# Altium PCB Meas_Board.PcbDoc
Units mm, origin at the board's own origin, x right, y up, seen from the top; angles counter-clockwise.
Board outline 25.4 x 55.12 mm, 2 copper layers (Top Layer, Bottom Layer); 28 components, 21 nets, 103 pads, 35 vias.
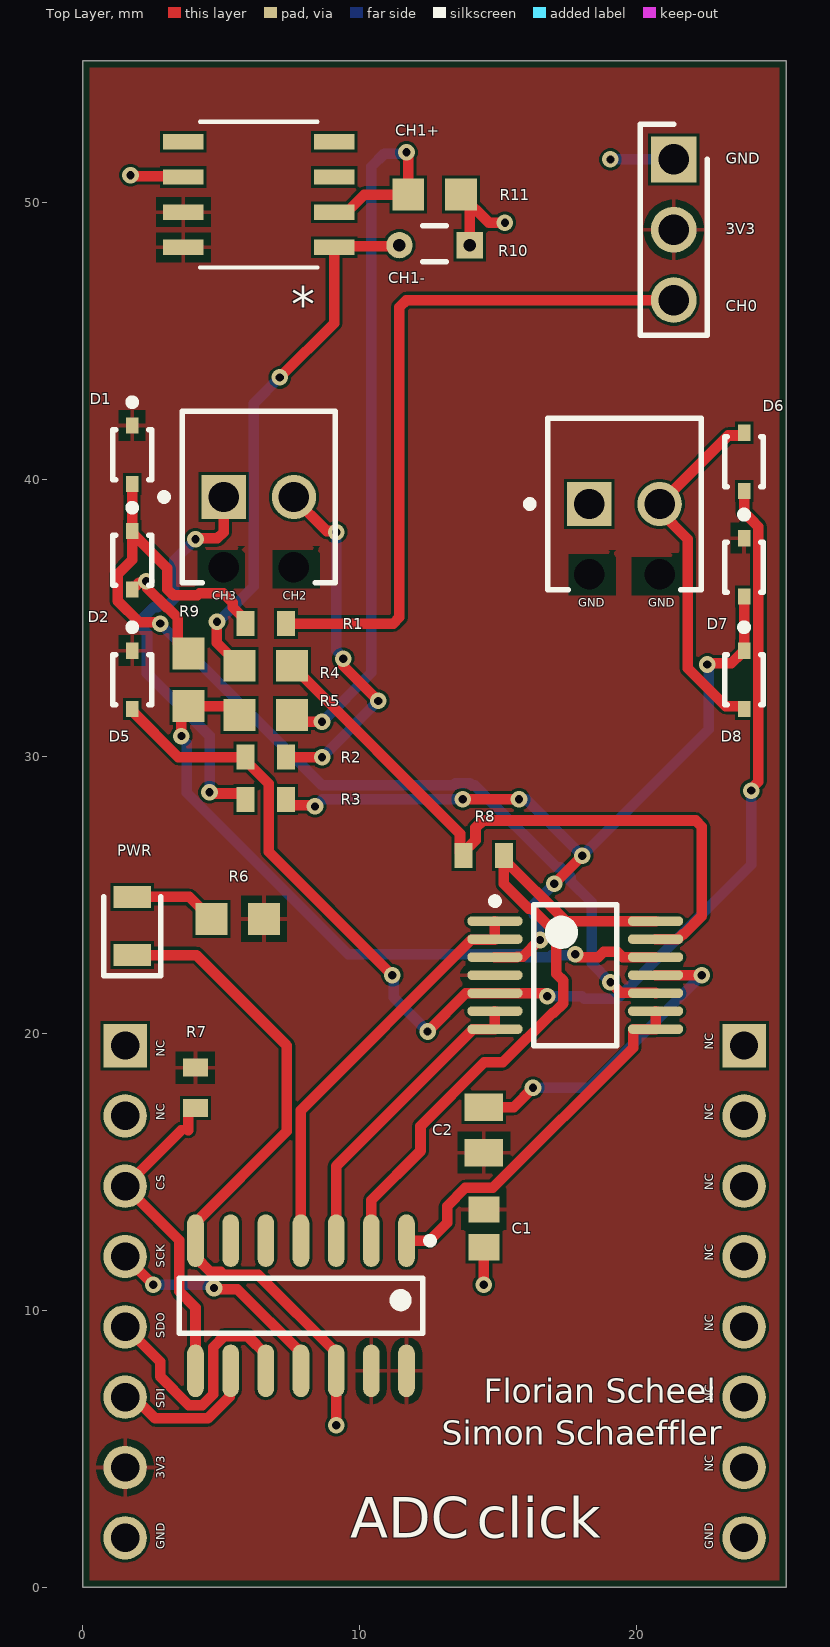
[diagram p0: Top Layer view]
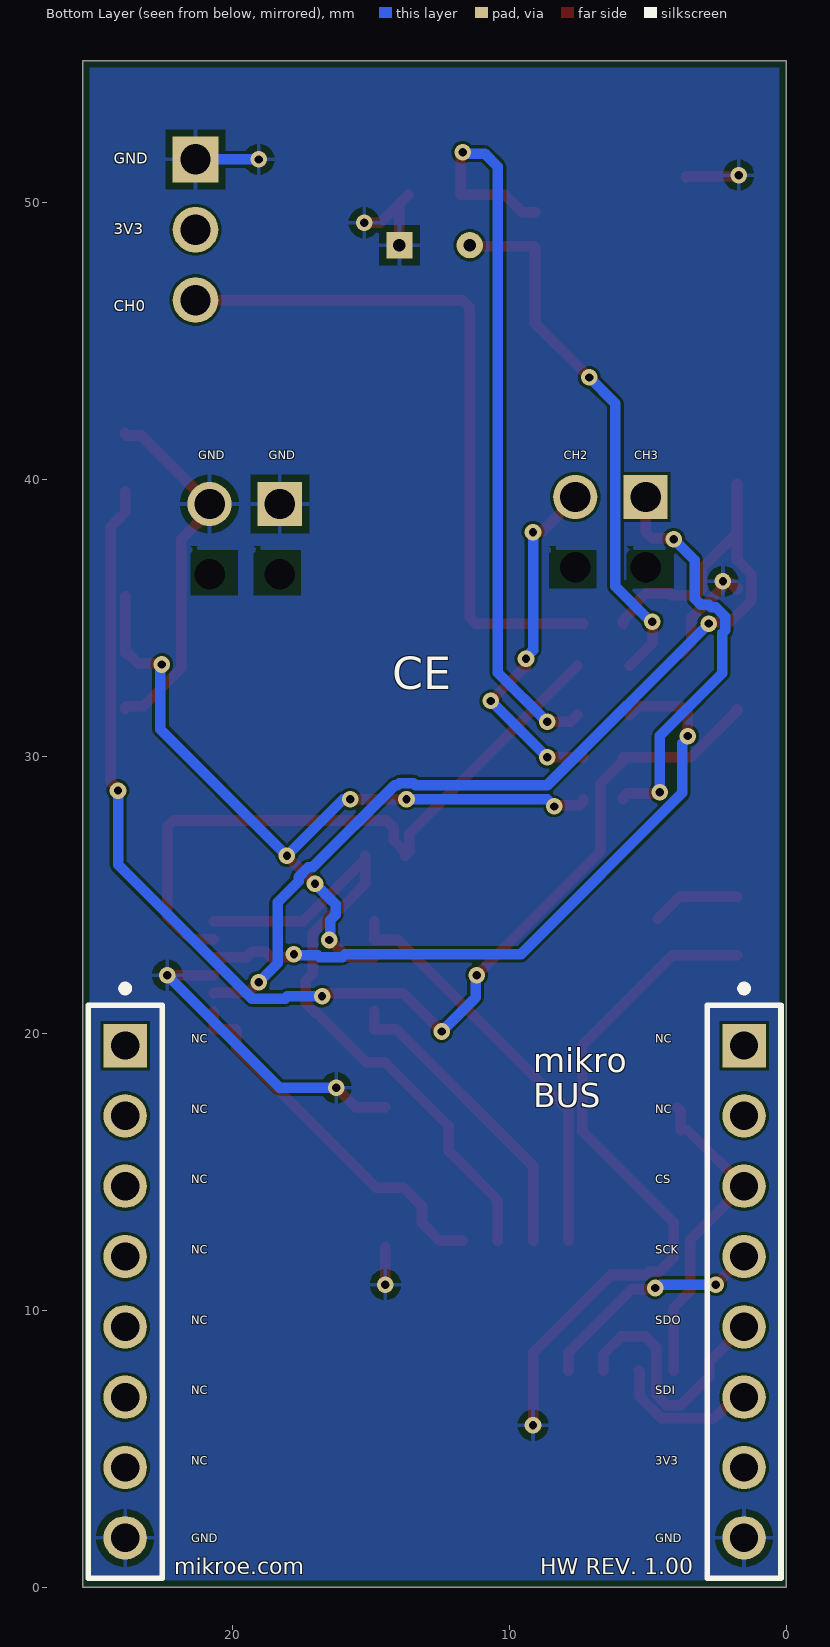
[diagram p1: Bottom Layer view, seen from below]
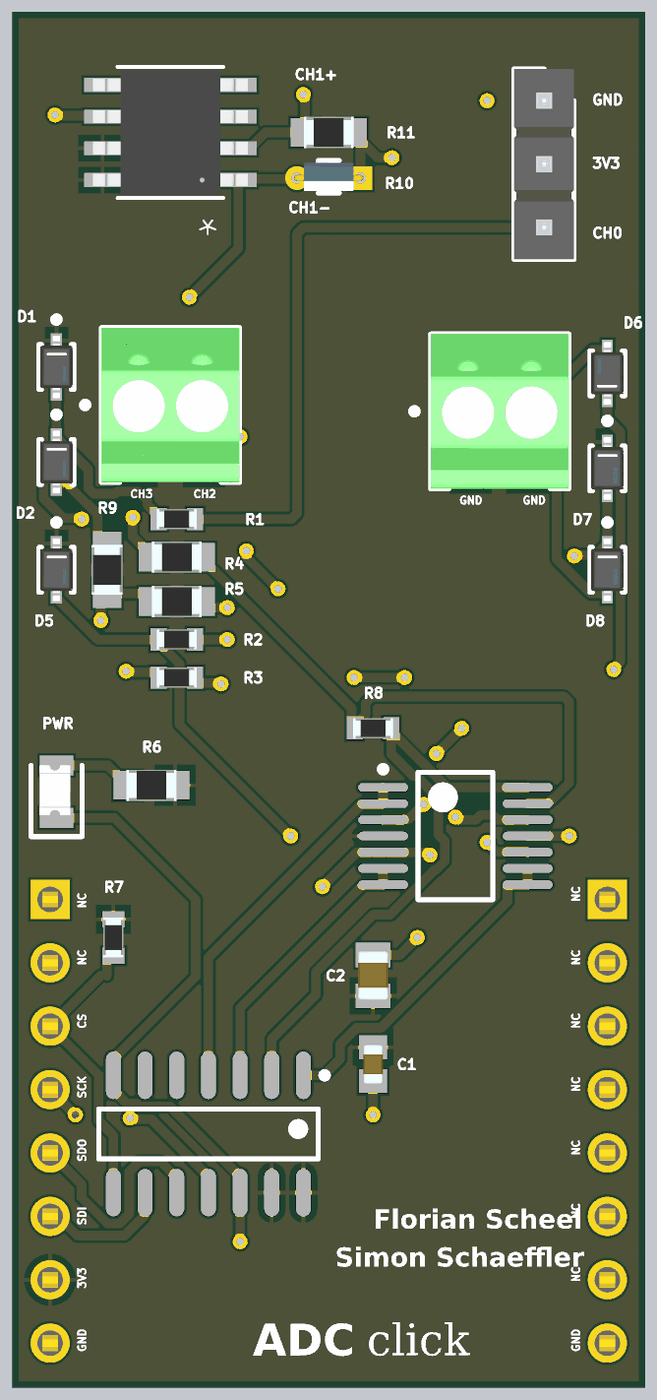
[diagram p2: 3D render of the assembled board from above, using the file's embedded part models]

## Layer stack, top to bottom
Top Solder: solder mask 0.0102, Solder Resist, Dk 3.5
Top Layer: signal copper 0.0356
Dielectric 1: dielectric 0.32, FR-4, Dk 4.8
Bottom Layer: signal copper 0.0356
Bottom Solder: solder mask 0.0102, Solder Resist, Dk 3.5

## Board outline
0,0 25.4,0 25.4,55.118 0,55.118

## Design rules (kind name [scope] priority, off if disabled: settings)
Clearance [All] p1: gap=0.1 ignorepadtopadclearanceinfootprint=FALSE except(0: Arc-Hole Track-Hole SMDPad-Hole THPad-Hole Via-Hole Fill-Hole Poly-Hole Region-Hole Text-Hole)
DiffPairsRouting [All] p1: maxlimit=10 minlimit=0.125 mostfreqgap=0.15 toplayer_minwidth=0.381 toplayer_maxwidth=0.381 toplayer_prefwidth=0.381 bottomlayer_minwidth=0.381 bottomlayer_maxwidth=0.381 bottomlayer_prefwidth=0.381 maxuncoupledlength=12.7
FabricationTestPointUsage FabricationTestPointUsage_1 [All] p1: valid=0 allowmultiple=FALSE
FabricationTestpoint FabricationTestpoint_1 [All] p1: side=3 testpointundercomponent=TRUE minsize=1.016 maxsize=2.54 preferedsize=1.524 minholesize=0 maxholesize=1.016 preferedholesize=0.813 testpointgrid=0.025 allowsidetop=TRUE allowsidebottom=TRUE usegrid=TRUE gridtolerance=0
HoleSize [All] p1: absolutevalues=TRUE maxlimit=6 minlimit=0.1 maxpercent=80.000 minpercent=20.000
HoleSize FabricationTestpoint [All] p2 off: absolutevalues=TRUE maxlimit=2.54 minlimit=0.025 maxpercent=80.000 minpercent=20.000
HoleSize FabricationTestPointUsage [All] p3 off: absolutevalues=TRUE maxlimit=2.54 minlimit=0.025 maxpercent=80.000 minpercent=20.000
MinimumSolderMaskSliver [All] p1: minsoldermaskwidth=0.07
MinimumSolderMaskSliver SilkscreenOverComponentPads [All] p2: minsoldermaskwidth=0.254
PlaneClearance [All] p1: clearance=0.5
PlaneConnect [All] p1: planeconnectstyle=Relief reliefexpansion=0.4 reliefentries=4 reliefconductorwidth=0.15 reliefairgap=0.15
PolygonConnect [All] p1: connectstyle=Relief reliefconductorwidth=0.15 reliefentries=4 polygonreliefangle="90 Angle" airgapwidth=0.254
RoutingCorners [All] p1: cornerstyle=45-Degree minsetback=1.25 maxsetback=1.25
RoutingVias [All] p1: holewidth=0.3 width=0.6 viastyle="Through Hole" minholewidth=0.2 minwidth=0.45 maxholewidth=0.45 maxwidth=0.75
SilkToSolderMaskClearance [IsPad] p1: minsilkscreentomaskgap=0.2 clearancetoexposedcopper=TRUE
SolderMaskExpansion [All] p1: expansion=0.03 istentingtop=FALSE
SupplyNets "Schematic Supply Nets_1" [InNet('3V3')] p1: voltage=0.000
SupplyNets "Schematic Supply Nets" [InNet('GND')] p2: voltage=0.000
Width [All] p1: maxlimit=10 minlimit=0.1 preferedwidth=0.125 minimp=50.000000 maximp=50.000000 favimp=50.000000
21 further rules are at their usual default settings.

## Classes and differential pairs
component class U_ADCclick: C1 C2 D1 D2 D5 D6 D7 D8 PWR R1 R2 R3 R4 R5 R6 R7 R8 R9
component class Meas_Board: R10 R11

## Components (designator, comment, footprint, x,y, rotation, side; value= is the part's Value field where it differs from the comment)
C1 "Cap_Generic" IMP_0603 14.478,12.954 r270 top value=100nF
C2 "Cap_Generic" IMP_0805 14.478,16.51 r90 top value=1µF
D1 "BAT43WS-7-F" FP-SOD323-MFG 1.778,40.894 r270 top value=10pF
D2 "BAT43WS-7-F" FP-SOD323-MFG 1.778,37.084 r270 top value=10pF
D5 "BAT43WS-7-F" FP-SOD323-MFG 1.778,32.766 r270 top value=10pF
D6 "BAT43WS-7-F" FP-SOD323-MFG 23.876,40.64 r90 top value=10pF
D7 "BAT43WS-7-F" FP-SOD323-MFG 23.876,36.83 r270 top value=10pF
D8 "BAT43WS-7-F" FP-SOD323-MFG 23.876,32.766 r270 top value=10pF
J1 "TSW-108-08-G-S" FP-TSW-108-08-G-S-MFG 1.524,10.668 r270 bottom
J2 "TSW-108-08-G-S" FP-TSW-108-08-G-S-MFG 23.876,10.668 r270 bottom
J3 "Header-3P" HDRV3W64P254_1X3_762X241X838P 21.336,51.562 r270 top
J4 "1725656" PHOE-1725656-2 6.35,39.37 r0 top
J5 "1725656" PHOE-1725656-2 19.558,39.116 r0 top
PWR "SM0805GCL" LEDC2012X80N 1.778,23.876 r90 top (schematic designator LED1)
R1 "Res_generic" IMP-0603 6.604,34.798 r180 top value=1K
R2 "Res_generic" IMP-0603 6.604,29.972 r180 top value=1K
R3 "Res_generic" IMP-0603 6.604,28.448 r0 top value=1K
R4 "Res_generic" IMP-0805 6.604,33.274 r0 top value=1k
R5 "Res_generic" IMP-0805 6.604,31.496 r180 top value=1k
R6 "Res_generic" IMP-0805 5.588,24.13 r0 top value=220
R7 "Res_generic" IMP-0603 4.064,18.034 r90 top value=100K
R8 "Res_generic" IMP-0603 14.478,26.416 r0 top value=100k
R9 "Res_generic" IMP-0805 3.81,32.766 r270 top value=100k
R10 "NB-PTCO-182" FP-PTFF-MFG 12.7,48.514 r180 top
R11 "Res_generic" IMP-0805 12.7,50.292 r180 top value=1k
U1 "MCP6284-E/ST" TSSOP-ST14_M 17.78,22.098 r0 top
U2 "REF200AU/2K5G4" D8_TEX 6.35,50.292 r180 top
U3 "MCP3204-CI/SL" SOIC-SL14_L 7.874,10.16 r270 top

## Footprints (in the part's own frame and the unit in brackets; to place one, negate y for a bottom-side part, rotate by r counter-clockwise, add the part's x,y. Pads: shape width x height; smd on the part's side, far side on the other; paste and mask are expansions set on the pad)
D8_TEX [mil]
  rect 57.5x22 smd paste+0 mask+0: 1(-107.25,75) 2(-107.25,25) 3(-107.25,-25) 4(-107.25,-75) 5(107.25,-75) 6(107.25,-25) 7(107.25,25) 8(107.25,75)
  silkscreen extent -84,-104 84,104, body extent -122,-99 122,99, height 69
FP-PTFF-MFG [mm]
  rect 0.95x0.95 hole 0.45 paste-2539.97 mask+0: 1(-1.27,0.05)
  round 0.95 hole 0.45 paste-2539.97 mask+0: 2(1.27,0.05)
  silkscreen extent -0.42,-0.65 0.42,0.65, body extent -1.85,-0.75 1.85,0.75, height 0.25
FP-SOD323-MFG [mm]
  rect 0.59x0.45 smd paste+0 mask+0: 1(-1.055,0) 2(1.055,0)
  silkscreen extent -2.02,-0.7 0.9,0.7, body extent -1.45,-0.8 1.45,0.8, height 0.25
FP-TSW-108-08-G-S-MFG [mm]
  rect 1.57x1.57 hole 1.02 paste-2539.97 mask+0: 1(-8.89,0)
  round 1.57 hole 1.02 paste-2539.97 mask+0: 2(-6.35,0) 3(-3.81,0) 4(-1.27,0) 5(1.27,0) 6(3.81,0) 7(6.35,0) 8(8.89,0)
  silkscreen extent -11.07,-1.34 10.35,1.34, body extent -10.29,-1.27 10.16,1.27, height 8.71
HDRV3W64P254_1X3_762X241X838P [mm]
  rect 1.65x1.65 hole 1.1: 1(0,0)
  round 1.65 hole 1.1: 2(2.54,0) 3(5.08,0)
  silkscreen extent -1.27,-1.2 6.35,1.2, body extent -1.27,-1.2 6.35,1.2, height 8.38
IMP-0603 [mm]
  rect 0.65x0.9 smd: 1(-0.725,0) 2(0.725,0)
  body extent -0.8,-0.4 0.8,0.4, height 0.45
IMP-0805 [mm]
  rect 1.15x1.15 smd: 1(-0.95,0) 2(0.95,0)
  body extent -1,-0.63 1,0.63, height 0.5
IMP_0603 [mm]
  rect 0.95x1.12 smd: 1(-0.68,0) 2(0.68,0)
  body extent -0.8,-0.4 0.8,0.4, height 1.1
IMP_0805 [mm]
  rect 0.99x1.39 smd: 1(-0.82,0) 2(0.82,0)
  body extent -1,-0.63 1,0.63, height 1.35
LEDC2012X80N [mm]
  rect 0.8x1.35 smd: 1(-1.05,0) 2(1.05,0)
  silkscreen extent -1.8,-1.02 1.05,1.02, body extent -0.94,-0.56 1.06,0.68, height 0.87
PHOE-1725656-2 [mm] "Connector, 2-Leads, Body 6.2x5.4mm, Pitch 2.54mm"
  rect 1.6x1.6 hole 1.1: 1(-1.27,0)
  round 1.6 hole 1.1: 2(1.27,0)
  round 0 hole 1.1 unplated: MH1(-1.27,-2.54) MH2(1.27,-2.54)
  silkscreen extent -3.54,-3.1 2.77,3.1, body extent -2.77,-3.1 2.77,3.1, height 9
SOIC-SL14_L [mm] "SOIC, 14-Leads, Body 8.7x3.9mm, Pitch 1.27mm, IPC High Density"
  oval 1.9x0.6 smd: 1(-2.35,3.81) 2(-2.35,2.54) 3(-2.35,1.27) 4(-2.35,0) 5(-2.35,-1.27) 6(-2.35,-2.54) 7(-2.35,-3.81) 8(2.35,-3.81) 9(2.35,-2.54) 10(2.35,-1.27) 11(2.35,0) 12(2.35,1.27) 13(2.35,2.54) 14(2.35,3.81)
  silkscreen extent -2.47,-4.4 1,4.79, body extent -2,-4.38 2,4.38, height 1.75
TSSOP-ST14_M [mm] "TSOP, 14-Leads, Body 5x4.4mm, Pitch 0.65mm, IPC Low Density"
  oval 2x0.35 smd: 1(-2.9,1.95) 2(-2.9,1.3) 3(-2.9,0.65) 4(-2.9,0) 5(-2.9,-0.65) 6(-2.9,-1.3) 7(-2.9,-1.95) 8(2.9,-1.95) 9(2.9,-1.3) 10(2.9,-0.65) 11(2.9,0) 12(2.9,0.65) 13(2.9,1.3) 14(2.9,1.95)
  silkscreen extent -3.02,-2.55 1.5,2.8, body extent -2.25,-2.55 2.25,2.55, height 1.2

## Part data
C1 C2: "Capacitor", Rated Voltage=1kV, Tolerance=+/-10%, Ceramic Type=X7R
D1 D2 D5 D6 D7 D8: library part CMP-12790-000055-1, "DIODE SCHOTTKY 30V 200MA SOD323", Capacitance=10pF, Forward Current=200mA, Manufacturer="Diodes Inc.", Max Junction Temp=+125°C, Max Repetitive Reverse Voltage=30V, Max Surge Forward Current=4A, Package=SOD323, Peak Reverse Current=0.5uA, Temperature="-55°C to +125°C", Temperature Range Low=-55°C, Automotive=Yes, Automotive Grade="Grade 1", Category=Diode, ComponentLink2Description=Datasheet, ComponentLink2URL=https://www.diodes.com/assets/Datasheets/ds30100.pdf, Device Class L1="Discrete Semiconductors", Device Class L2=Diodes, Device Class L3="Schottky Diodes", Digikey Description="DIODE SCHOTTKY 30V 200MA SOD323", Footprint Url=https://www.diodes.com/assets/Package-Files/SOD323.pdf, Height=1.2mm, Lead Free=Yes, Manufacturer Part Number=BAT43WS-7-F, Mouser Description="Schottky Diodes & Rectifiers 30V 200mW", Octopart=https://octopart.com/bat43ws-7-f-diodes+inc.-326114, Reverse Voltage=30V, RoHS=TRUE, Standoff Height=0.05mm, Temperature Range High=+125°C
J1 J2: library part CMP-02766-000001-1, "CONN HEADER VERT 8POS 2.54MM", Manufacturer=Samtec, Temperature="-55°C to +125°C", Temperature Range High=+125°C, Temperature Range Low=-55°C, Automotive=No, Category=Conn, ComponentLink2Description=Datasheet, ComponentLink2URL=http://suddendocs.samtec.com/catalog_english/tsw_th.pdf, Conn Gender=Male, Conn Orientation=Straight, Contact Material=Gold,Nickel, Device Class L1=Connectors, Device Class L2="Headers and Wire Housings", Device Class L3=unset, Digikey Description="CONN HEADER VERT 8POS 2.54MM", Footprint Url=http://suddendocs.samtec.com/prints/tsw-xxx-xx-x-x-xx-xxx-footprint.pdf, Height=8.71mm, Lead Free=Yes, Manufacturer Part Number=TSW-108-08-G-S, Mouser Description="TSW - Samtec 2.54mm Pin Header 13.46mm Overall Pin Length 5.08mm Tail", Number Of Contacts=8, Number Of Rows=1, Octopart=https://octopart.com/tsw-108-08-g-s-samtec-272653, Package=TSW-108-08-G-S, Pitch=2.54mm, RoHS=TRUE
J3: "Connector", Arrow Part Number=TSW-103-07-S-S-LL, Manufacturer_Name=SAMTEC, Mouser Part Number=200-TSW10307SSLL, Arrow Price/Stock=https://www.arrow.com/en/products/tsw-103-07-s-s-ll/samtec?region=nac, Datasheet Link=http://suddendocs.samtec.com/catalog_english/tsw_th.pdf, Height=8.38mm, Manufacturer_Part_Number=TSW-103-07-S-S-LL, Mouser Price/Stock=https://www.mouser.co.uk/ProductDetail/Samtec/TSW-103-07-S-S-LL?qs=rU5fayqh%252BE2qFj1BrU5SIQ%3D%3D
J4 J5: library part CMP-2000-05299-1, "Male Header, Pitch 2.54 mm, 1 x 2 Position, Height 9 mm, Tail Length 3.5 mm", Colour=Green, Manufacturer="Phoenix Contact", Content=250pc(s), Datasheet URL=http://datasheet.octopart.com/1725656-Phoenix-Contact-datasheet-5302866.pdf, Datasheet Version=Apr-08, Industrial packaging=Yes, Manufacturer part No.=1725656, Manufacturer URL=http://www.phoenixcontact.com/, Number Of Contacts=2, Pitch=2.54mm, Type=MPT0,5/2-2,54
PWR: "LED", Manufacturer_Name=Bivar, Mouser Part Number=749-SM0805GCL, Arrow Part Number=SM0805GCL, Arrow Price/Stock=https://www.arrow.com/en/products/sm0805gcl/bivar?region=nac, Datasheet Link=https://datasheet.datasheetarchive.com/originals/distributors/Datasheets-DGA13/1161700.pdf, Height=0.8mm, Manufacturer_Part_Number=SM0805GCL, Mouser Price/Stock=https://www.mouser.co.uk/ProductDetail/Bivar/SM0805GCL?qs=jaLxTFIJCitl%252Bw30syUp6A%3D%3D
R1 R2 R3 R4 R5 R6 R7 R8 R9: "Resistor", Power="125 mW", Temperature Coefficent="25 ppm/°C", Tolerance=+/-1%
R10: library part CMP-03790-88648364-1, "NB-PTCO-182 Pt1000, 2.0X4.0, Class B, Ptff102B1A0", Manufacturer Lifecycle Status=ACTIVE, Lifecycle Status=Production, NexarPartId=88648364
R11: "Resistor", Power="125 mW", Temperature Coefficent="25 ppm/°C", Tolerance=+/-0.1%
U1: library part CMP-0187-00065-3, "None", Case/Package=TSSOP, Input Bias Current=1pA, Input Offset Voltage (Vos)=3mV, Input Offset Voltage-Max=5mV, Max Operating Temperature=125°C, Max Supply Voltage=5.5V, Min Operating Temperature=-40°C, Min Supply Voltage=2.2V, Nominal Supply Current=450uA, Output Current=25mA, Package Quantity=96, Power Supply Rejection Ratio (PSRR)=70dB, Voltage Gain=110dB, Amplifier Type="GENERAL PURPOSE", Bandwidth=5MHz, Common Mode Rejection Ratio=70dB, Gain Bandwidth Product=5MHz, Height=0.9mm, Lead Free="Lead Free", Length=5mm, Mount="Surface Mount", Number of Amplifiers=4, Number of Channels=4, Number of Circuits=4, Number of Elements=4, Number of Pins=14, Packaging=Rail/Tube, Radiation Hardening=No, REACH SVHC="No SVHC", RoHS Compliant=Yes, Slew Rate=2.5V/µs, Slew Rate-Nom=2.5V/µs, Supply Current=450uA, Technology=CMOS, Unity Gain Bandwidth Product=5MHz, Width=4.4mm
U2: library part REF200AU2K5G4, "Description", Manufacturer_Name="Texas Instruments", Copyright="Copyright (C) 2026 Ultra Librarian. All rights reserved.", Manufacturer_Part_Number=REF200AU/2K5G4, RefDes=RefDes, Type=Type
U3: library part CMP-0188-00361-2, "2.7V 4-Channel/8-Channel 12-Bit A/D Converters with SPI Serial Interface, 14-Pin SOIC 150mil, C Performance Grade, Industrial Temperature", Code_IPC=SOIC127P600-14, Code_JEDEC=MS-012-AB, ComponentLink1Description="Manufacturer URL", ComponentLink1URL=http://www.microchip.com/, ComponentLink2Description=Datasheet, ComponentLink2URL=http://ww1.microchip.com/downloads/en/DeviceDoc/21298e.pdf, ComponentLink3Description="Package Specification", ComponentLink3URL=http://www.microchip.com/stellent/groups/techpub_sg/documents/packagingspec/en012702.pdf, DatasheetVersion="revE, Sep-2008", PackageDescription="14-Lead Plastic Small Outline (SL) - Narrow, 3.90mm Body [SOIC]", PackageReference=SOIC-SL14, PackageVersion="revBB, Aug-2009", RevisionNote="URLs added."

## Via types
v1: diameter 0.6, hole 0.3, Top Layer to Bottom Layer, 35 vias

## Nets (pads, with @x,y where several pads share a name; then routed paths per layer and width w, separated by ;. In a path a pad name is that pad's centre, name@x,y a point inside that pad or via, vN(x,y) a via of type N, cw(c..) or ccw(c..) an arc to the next point about the centre after c; other vN are vias at no path point)
3V3: C1.1 C2.1 D1.1 D5.1 D7.1 J1.7 J3.2 R6.2 R7.2 U1.4 U2.7 U2.8 U3.13 U3.14
CH0: J3.3 R1.1 | length 25.4
  Top Layer w0.381: R1.1 11.207,34.798 11.43,35.021 11.43,46.228 11.684,46.482 J3.3
CH1+: R5.1 R11.2 U2.2 | length 28
  Top Layer w0.381: R5.1 7.798,31.252 v1(8.634,31.252) ; U2.2 9.525,49.657 10.16,50.292 R11.2 11.75,51.75 v1(11.684,51.816)
  Bottom Layer w0.381: v1(8.634,31.252) 8.636,31.25 8.636,31.242 10.416,33.022 10.414,33.024 10.414,51.297 10.891,51.774 11.642,51.774 v1(11.684,51.816)
CH1-: R4.1 R10.2 U2.1 | length 19.6
  Top Layer w0.381: v1(4.841,34.867) 4.826,34.852 4.826,34.102 R4.1 ; v1(7.112,43.688) 9.074,45.65 U2.1 9.113,48.425 11.391,48.425 R10.2
  Bottom Layer w0.381: v1(4.841,34.867) 4.895,34.867 6.171,36.143 6.171,42.747 v1(7.112,43.688)
CH2: J4.2 R2.1 | length 13
  Top Layer w0.381: R2.1 v1(8.636,29.972) ; J4.2 7.62,39.324 8.802,38.142 9.102,38.142 v1(9.144,38.1) ; v1(9.398,33.528) 9.398,33.274 v1(10.668,32.004)
  Bottom Layer w0.381: v1(8.636,29.972) v1(10.668,32.004) ; v1(9.144,38.1) 9.144,33.841 9.398,33.587 v1(9.398,33.528)
CH3: J4.1 R3.1 | length 15
  Top Layer w0.381: v1(4.064,37.846) 4.095,37.877 4.857,37.877 5.08,38.1 J4.1 ; v1(4.572,28.702) 4.614,28.66 5.744,28.66 5.879,28.526 R3.1
  Bottom Layer w0.381: v1(4.064,37.846) 3.302,37.084 3.302,35.7 3.079,35.477 2.793,35.477 2.704,35.388 2.549,35.388 2.204,35.043 2.204,34.553 2.313,34.444 2.313,33.009 4.572,30.75 v1(4.572,28.702)
GND: C1.2 C2.2 D2.2 D6.2 D8.2 J1.8 J2.8 J3.1 J5.1 J5.2 PWR.1 R9.1 R10.1 R11.1 U1.11 U2.6 U3.7 U3.12 | length 63.3
  Top Layer w0.381: v1(1.718,50.994) 1.751,50.96 3.592,50.96 U2.6 ; PWR.1 4.098,22.826 7.366,19.558 7.366,16.462 4.064,13.16 U3.7 4.064,11.919 4.594,11.389 4.969,11.389 5.089,11.269 6.335,11.269 9.144,8.46 U3.12 v1(9.144,5.842) ; D2.2 1.778,36.099 1.813,36.134 1.883,36.134 2.029,36.28 2.244,36.28 v1(2.286,36.322) 2.328,36.28 2.328,36.077 3.016,35.388 3.039,35.388 3.425,35.002 3.425,34.101 R9.1 ; R10.1 13.97,49.972 R11.1 14.666,49.276 v1(15.24,49.276) ; v1(14.478,10.922) C1.2 ; C2.2 15.552,17.33 v1(16.256,18.034) ; U1.11 v1(22.352,22.098) ; D8.2 23.876,31.781 23.841,31.816 23.218,31.816 21.844,33.189 21.844,37.846 20.828,38.862 J5.2 23.302,41.59 23.841,41.59 23.876,41.625 D6.2
  Bottom Layer w0.381: v1(16.256,18.034) 18.288,18.034 v1(22.352,22.098) ; v1(19.05,51.562) J3.1
NetD1_2: D1.2 D2.1 R1.2 U1.10 | length 37.3
  Top Layer w0.381: D2.1@1.778,38.069 3.048,36.799 3.048,36.037 3.271,35.814 4.13,35.814 4.212,35.896 5.071,35.896 5.416,35.551 5.416,35.386 5.879,34.923 R1.2 ; D1.2 D2.1 1.778,37.099 1.262,36.584 1.262,35.614 2.036,34.84 2.752,34.84 v1(2.794,34.798) ; v1(19.05,21.844) 19.43,21.464 20.665,21.464 U1.10
  Bottom Layer w0.381: v1(2.794,34.798) 8.641,28.951 13.384,28.951 13.471,29.038 13.961,29.038 14.048,28.951 14.147,28.951 17.108,25.99 17.263,25.99 17.608,25.645 17.608,25.49 18.37,24.728 18.37,22.524 v1(19.05,21.844)
NetD5_2: D5.2 D6.1 R2.2 U1.5 | length 45.6
  Top Layer w0.381: D5.2 1.778,31.641 3.447,29.972 R2.2 5.879,29.847 6.713,29.012 6.713,26.561 v1(11.176,22.098) ; v1(12.446,20.066) 13.828,21.448 U1.5 16.652,21.448 v1(16.764,21.336) ; D6.1 23.876,38.816 24.134,38.558 24.392,38.3 24.392,29.083 24.134,28.826 v1(24.134,28.766)
  Bottom Layer w0.381: v1(11.176,22.098) 11.218,22.056 11.218,21.294 v1(12.446,20.066) ; v1(16.764,21.336) 18.018,21.336 18.1,21.254 19.295,21.254 24.13,26.089 24.13,28.702 24.134,28.706 v1(24.134,28.766)
NetD7_2: D7.2 D8.1 R3.2 U1.3 | length 29.9
  Top Layer w0.381: R3.2 7.329,28.37 7.464,28.236 8.34,28.236 v1(8.382,28.194) ; v1(13.716,28.448) v1(15.748,28.448) ; U1.3 15.674,22.748 15.69,22.764 15.882,22.764 16.487,23.368 v1(16.51,23.368) ; v1(17.018,25.4) v1(18.034,26.416) ; v1(22.55,33.318) 22.592,33.36 23.415,33.36 23.771,33.716 23.841,33.716 23.876,33.751 D8.1 D7.2
  Bottom Layer w0.381: v1(8.382,28.194) 8.636,28.448 v1(13.716,28.448) ; v1(15.748,28.448) 16.002,28.448 v1(18.034,26.416) 22.606,30.988 22.606,33.274 22.594,33.274 v1(22.55,33.318) ; v1(16.51,23.368) 16.468,23.41 16.468,24.087 16.277,24.278 16.277,24.659 v1(17.018,25.4)
NetJ1_3: J1.3 R7.1 U3.8 | length 11.4
  Top Layer w0.381: 3.55,16.504 J1.3 3.474,12.528 3.474,10.679 4.064,10.089 U3.8 ; 3.804,16.504 3.804,17.174 R7.1@3.939,17.309
NetLED1_2: PWR.2 R6.1 | length 3.2
  Top Layer w0.381: PWR.2 3.842,24.926 R6.1
NetR4_2: R4.2 R8.1 U1.13 | length 24.2
  Top Layer w0.381: R4.2 13.618,27.21 13.618,26.551 R8.1 13.753,26.541 14.178,26.966 14.178,27.417 14.447,27.686 22.129,27.686 22.352,27.463 22.352,24.237 21.698,23.583 21.659,23.583 21.474,23.398 U1.13
NetR5_2: R5.2 R9.2 U1.12 | length 24.9
  Top Layer w0.381: v1(3.556,30.734) 3.556,31.562 R9.2 5.334,31.816 R5.2 ; v1(17.78,22.86) 17.892,22.748 18.611,22.748 18.805,22.942 19.295,22.942 19.489,22.748 U1.12
  Bottom Layer w0.381: v1(3.556,30.734) 3.556,30.679 3.755,30.48 3.755,28.684 9.579,22.86 15.922,22.86 16.032,22.75 16.848,22.75 16.917,22.818 17.738,22.818 v1(17.78,22.86)
NetR8_2: R8.2 U1.14 U3.2 | length 24.6
  Top Layer w0.381: U3.2 10.414,13.97 12.192,15.748 12.192,16.645 14.497,18.95 15.166,18.95 16.961,20.746 17.009,20.746 17.354,21.091 17.354,21.895 17.1,22.149 17.1,23.613 16.21,24.504 16.094,24.504 15.203,25.394 R8.2@15.203,26.291 ; R8.2 R8.2@15.203,26.291 ; U1.14 17.446,24.048 R8.2@15.203,26.291
NetU1_1: U1.1 U1.2 U3.4 | length 14.9
  Top Layer w0.381: U3.4 7.874,17.225 14.031,23.383 14.865,23.383 U1.2 U1.1
NetU1_6: U1.6 U1.7 U3.3 | length 11.1
  Top Layer w0.381: U3.3 9.144,15.206 14.086,20.148 U1.7 U1.6
NetU1_8: U1.8 U1.9 U3.1 | length 13.5
  Top Layer w0.381: U3.1 12.51,12.51 13.154,13.154 13.154,13.756 13.813,14.415 14.804,14.415 19.871,19.482 19.871,20.133 19.886,20.148 U1.8 U1.9
SCK: J1.4 U3.11 | length 8.4
  Top Layer w0.381: J1.4 v1(2.54,10.922) ; v1(4.733,10.799) 4.775,10.757 5.577,10.757 7.874,8.46 U3.11
  Bottom Layer w0.381: v1(2.54,10.922) 4.55,10.922 4.673,10.799 v1(4.733,10.799)
SDI: J1.6 U3.9 | length 5.4
  Top Layer w0.381: J1.6 1.846,6.858 2.615,6.088 4.508,6.088 5.292,6.873 5.292,7.768 U3.9
SDO: J1.5 U3.10 | length 9.5
  Top Layer w0.381: J1.5 2.785,8.137 2.785,7.603 3.819,6.569 4.309,6.569 4.699,6.96 4.699,8.66 5.089,9.051 5.962,9.051 6.604,8.409 U3.10
pads on no net: J1.1 J1.2 J2.1 J2.2 J2.3 J2.4 J2.5 J2.6 J2.7 J4.MH1 J4.MH2 J5.MH1 J5.MH2 U2.3 U2.4 U2.5 U3.5 U3.6

## Polygon pours and split planes (outlines as drawn)
GND on Bottom Layer "GND_L02_P005" (solid, pour order 5): 0.254,0.254 0.254,54.864 25.146,54.864 25.146,0.254
3V3 on Top Layer "3V3_L01_P002" (solid, pour order 2): 0.254,54.864 25.146,54.864 25.146,0.254 0.254,0.254

## Other copper
Top Layer:
  pour cut-out: 21.51,35.814 21.51,37.082 21.256,37.336 21.51,37.336 21.364,37.19 19.812,37.19 19.812,35.814
  pour cut-out: 19.247,35.814 19.247,37.194 18.993,37.448 19.247,37.448 19.101,37.302 17.548,37.302 17.548,35.814
  pour cut-out: 8.556,36.068 8.556,37.336 8.302,37.59 8.556,37.59 8.41,37.444 6.858,37.444 6.858,36.068
  pour cut-out: 5.842,36.07 5.842,37.338 5.588,37.592 5.842,37.592 5.696,37.446 4.144,37.446 4.144,36.07
Bottom Layer:
  pour cut-out: 21.51,35.814 21.51,37.336 21.256,37.59 21.51,37.59 21.364,37.444 19.812,37.444 19.812,35.814
  pour cut-out: 19.224,35.814 19.224,37.336 18.97,37.59 19.224,37.59 19.078,37.444 17.526,37.444 17.526,35.814
  pour cut-out: 8.556,36.068 8.556,37.336 8.302,37.59 8.556,37.59 8.41,37.444 6.858,37.444 6.858,36.068
  pour cut-out: 5.762,36.068 5.762,37.336 5.508,37.59 5.762,37.59 5.616,37.444 4.064,37.444 4.064,36.068

## Silkscreen, mask and mechanical layers (free items; w line width, h text height)
Top Overlay:
  text "CH1+" at 11.276,52.424 h0.4
  text "GND" at 23.214,51.408 h0.4
  text "3V3" at 23.214,48.868 h0.4
  text "CH1-" at 11.022,47.09 h0.4
  text "CH0" at 23.214,46.074 h0.4
  text "CH3" at 4.672,35.66 h0.3
  text "CH2" at 7.212,35.66 h0.3
  text "GND" at 17.88,35.406 h0.3
  text "GND" at 20.42,35.406 h0.3
  text "NC" at 22.76,19.404 h0.3 r90
  text "NC" at 2.948,19.15 h0.3 r90
  text "NC" at 2.948,16.864 h0.3 r90
  text "NC" at 22.76,16.864 h0.3 r90
  text "CS" at 2.948,14.324 h0.3 r90
  text "NC" at 22.76,14.324 h0.3 r90
  text "NC" at 22.76,11.784 h0.3 r90
  text "SCK" at 2.948,11.53 h0.3 r90
  text "NC" at 22.76,9.244 h0.3 r90
  text "SDO" at 2.948,8.99 h0.3 r90
  text "NC" at 22.76,6.704 h0.3 r90
  text "SDI" at 2.948,6.45 h0.3 r90
  text "Florian Scheel" at 14.478,6.371 h1.5
  text "Simon Schaeffler" at 12.954,4.847 h1.5
  text "NC" at 22.76,4.164 h0.3 r90
  text "3V3" at 2.948,3.91 h0.3 r90
  text "GND" at 2.948,1.37 h0.3 r90
  text "GND" at 22.76,1.37 h0.3 r90
  text "ADC" at 9.654,1.284 h2.5
  text "click" at 14.224,1.289 h2.5
Bottom Overlay:
  text "GND" at 24.284,51.408 h0.4
  text "3V3" at 24.284,48.868 h0.4
  text "CH0" at 24.284,46.074 h0.4
  text "CH3" at 5.488,40.74 h0.3
  text "CH2" at 8.028,40.74 h0.3
  text "GND" at 18.696,40.74 h0.3
  text "GND" at 21.236,40.74 h0.3
  text "CE" at 14.222,32.035 h2
  text "NC" at 4.726,19.658 h0.3
  text "NC" at 21.49,19.658 h0.3
  text "mikro" at 9.144,18.299 h1.5
  text "NC" at 4.726,17.118 h0.3
  text "NC" at 21.49,17.118 h0.3
  text "BUS" at 9.143,17.039 h1.5
  text "CS" at 4.726,14.578 h0.3
  text "NC" at 21.49,14.578 h0.3
  text "SCK" at 4.726,12.038 h0.3
  text "NC" at 21.49,12.038 h0.3
  text "SDO" at 4.726,9.498 h0.3
  text "NC" at 21.49,9.498 h0.3
  text "SDI" at 4.726,6.958 h0.3
  text "NC" at 21.49,6.958 h0.3
  text "3V3" at 4.726,4.418 h0.3
  text "NC" at 21.49,4.418 h0.3
  text "GND" at 4.726,1.624 h0.3
  text "GND" at 21.49,1.624 h0.3
  text "HW REV. 1.00" at 8.889,0.261 h1
  text "mikroe.com" at 22.098,0.261 h1

## Text inside footprints (layer, text, board x,y; h text height)
U2: Top Overlay "*" at 8.382,47.498 h1.27 r180; Mechanical 13 "*" at 8.28,49.136 h1.27 r180